# Altium PCB RodManipulator_PCB.PcbDoc (part 1 of 2)
Units mm, origin at the board's own origin, x right, y up, seen from the top; angles counter-clockwise.
Board outline 49.23 x 28.82 mm, 2 copper layers (Top Layer, Bottom Layer); 74 components, 46 nets, 222 pads, 100 vias.
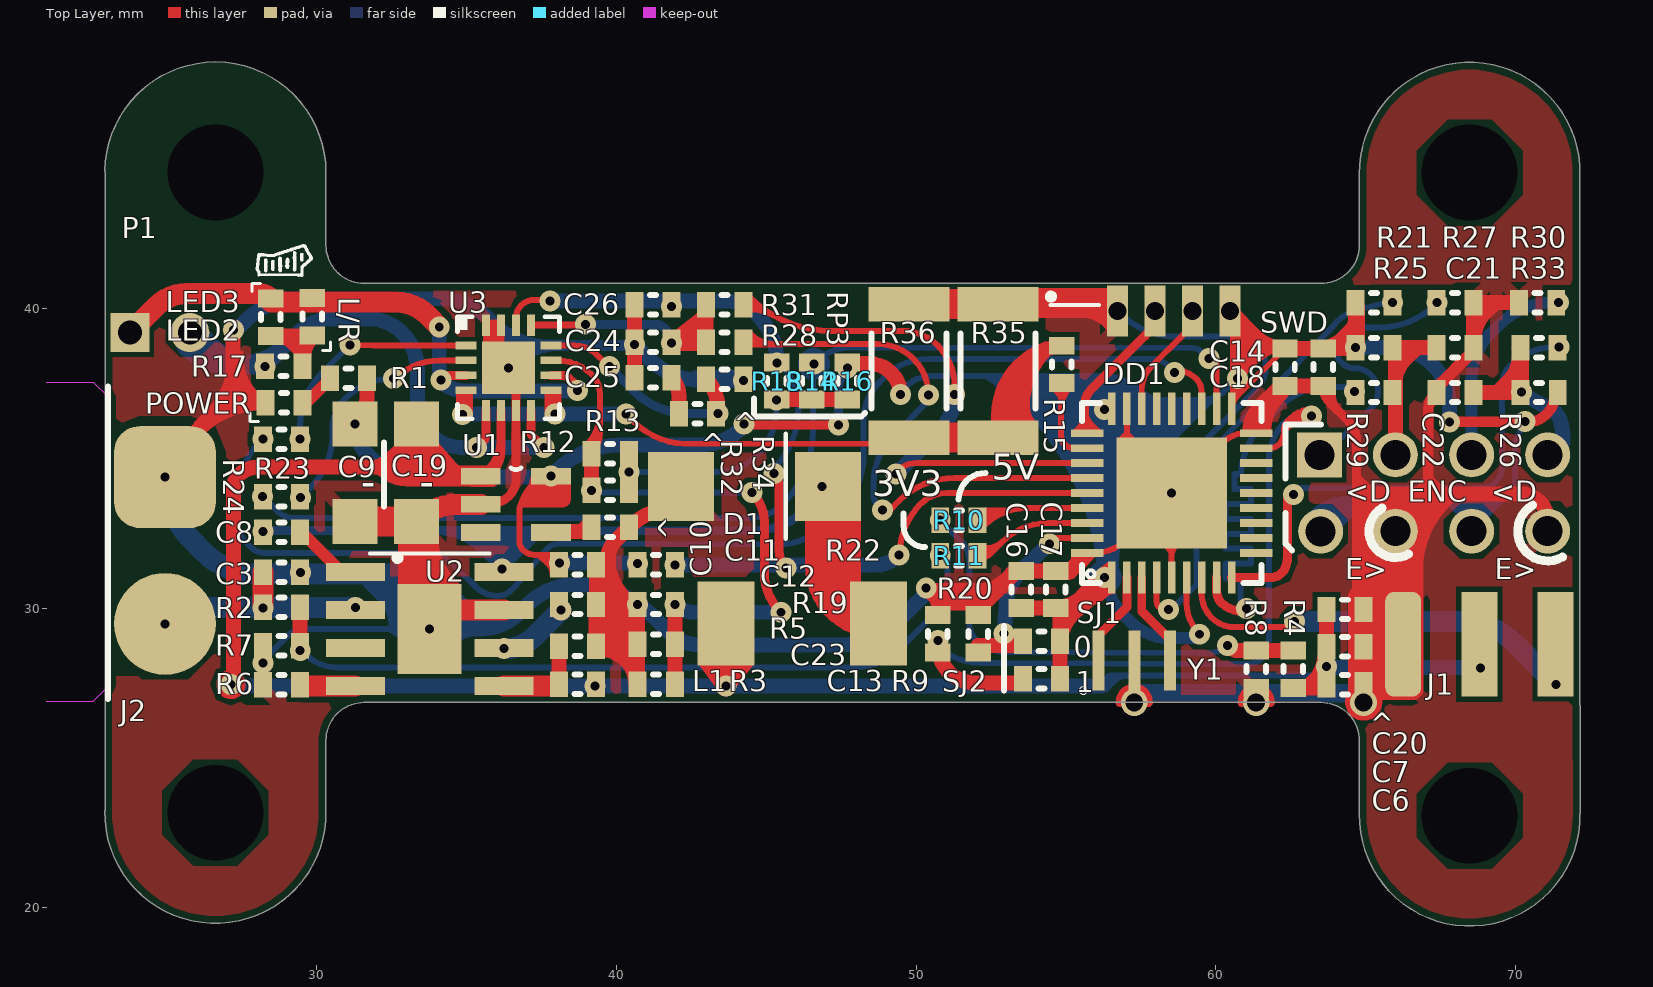
[diagram p0: Top Layer view]
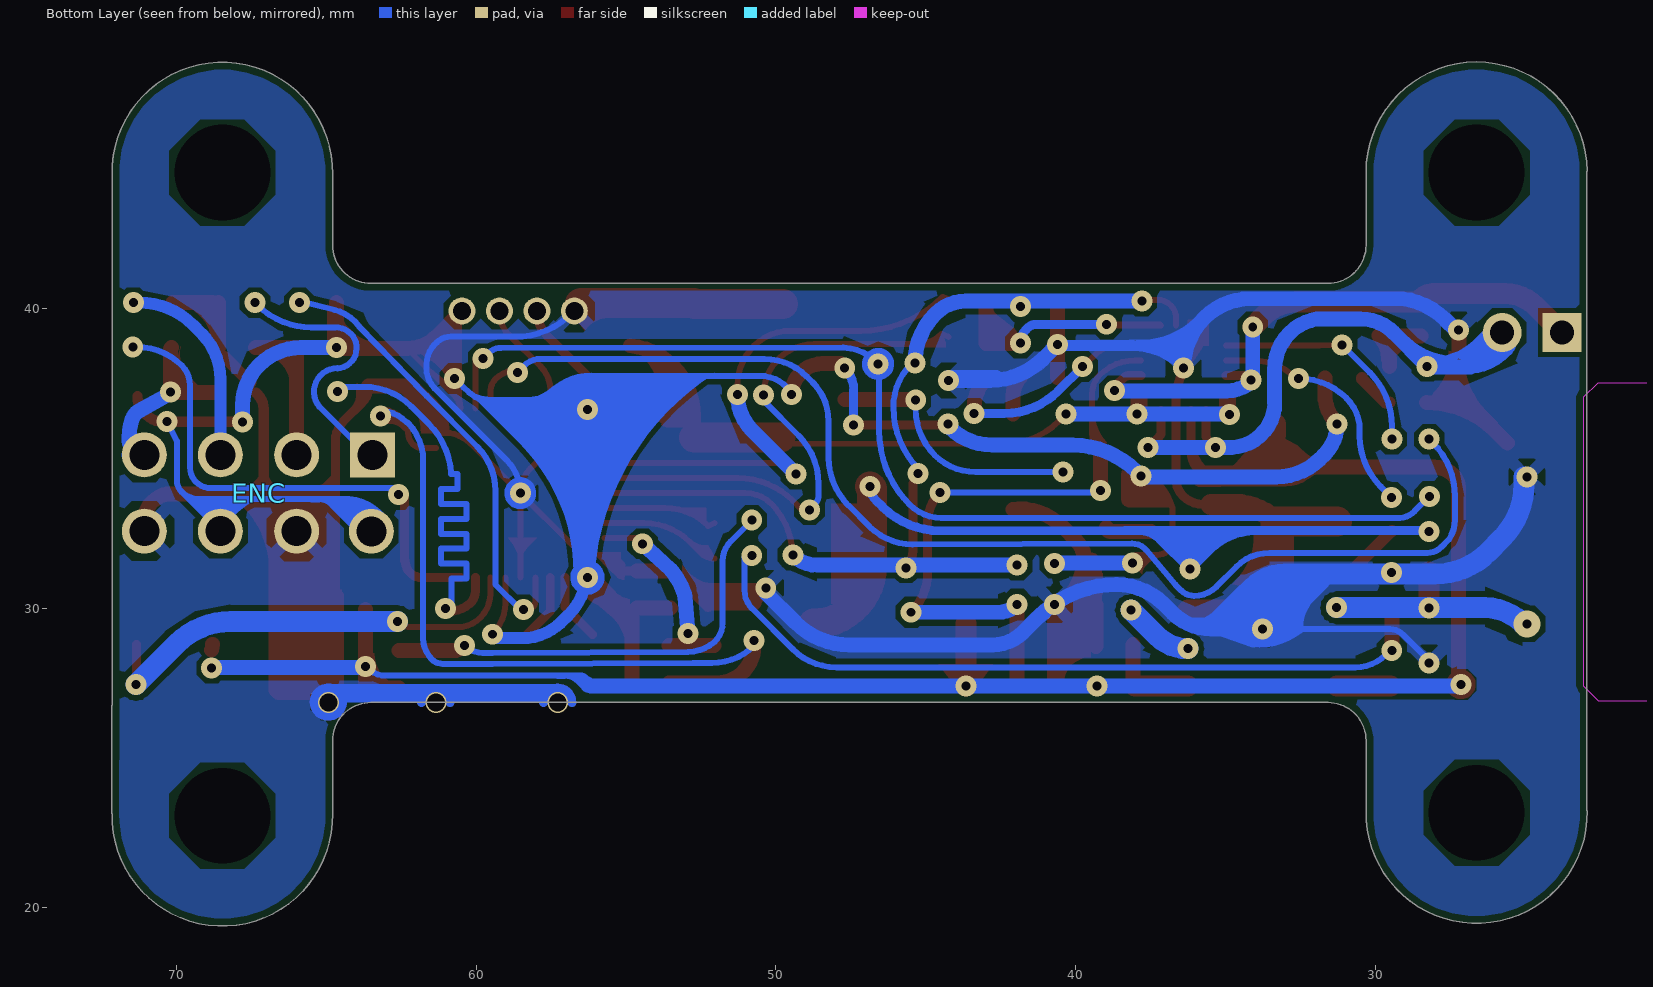
[diagram p1: Bottom Layer view, seen from below]
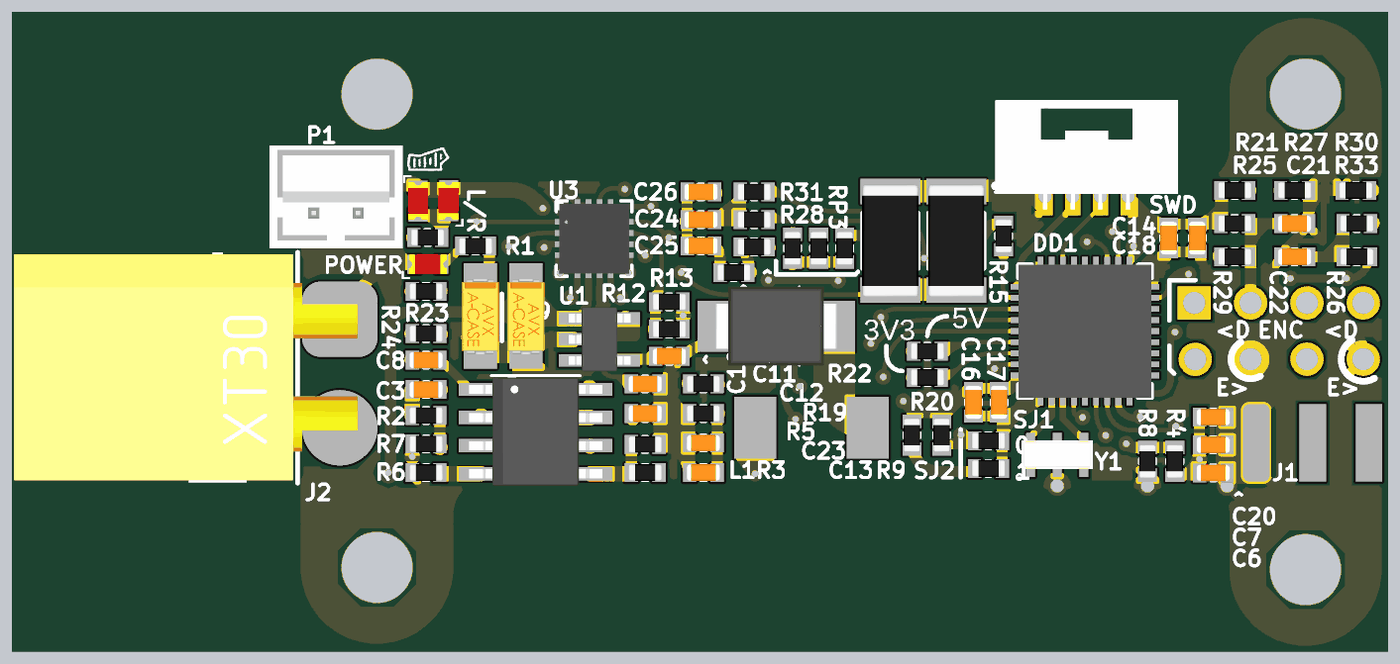
[diagram p3: 3D render of the assembled board from above, using the file's embedded part models]

## Layer stack, top to bottom
Top Solder: solder mask 0.0102, Solder Resist, Dk 3.5
Top Layer: signal copper 0.0356
Dielectric 1: dielectric 0.32, FR-4, Dk 4.8
Bottom Layer: signal copper 0.0356
Bottom Solder: solder mask 0.0102, Solder Resist, Dk 3.5

## Board outline
30.31,23.23 30.31,25.58 cw(c31.58,25.58) 31.58,26.85 63.52,26.85 cw(c63.52,25.58) 64.79,25.58 64.79,23.13 ccw(c68.47,23.07) 72.15,23.13 72.16,23.13 72.16,26.75 72.152,26.75 72.152,40.665 72.15,40.75 72.15,44.47 ccw(c68.47,44.53) 64.79,44.47 64.79,42.108 cw(c63.52,42.108) 63.52,40.838 61.148,40.838 31.58,40.838 cw(c31.58,42.108) 30.31,42.108 30.31,44.53 ccw(c26.62,44.53) 22.93,44.57 22.94,44.57 22.94,23.23 22.93,23.23 ccw(c26.62,23.17)

## Design rules (kind name [scope] priority, off if disabled: settings)
BoardOutlineClearance [All] p1: gap=0.25 ignorepadtopadclearanceinfootprint=FALSE
Clearance [All] p1: gap=0.17 ignorepadtopadclearanceinfootprint=FALSE
ComponentClearance [All] p1: gap=0.254 collisioncheckmode=3 verticalgap=2540 showdistances=FALSE
FanoutControl Fanout_SOIC [IsSOIC] p3: bgadir=Out bgaviamode=Closest fanoutstyle=Auto fanoutdirection=Alternating viagrid=0.025 // Fanout_SOIC (Default Rule)
FanoutControl Fanout_Small [(CompPinCount < 5)] p4: bgadir=Out bgaviamode=Closest fanoutstyle=Auto fanoutdirection=OutThenIn viagrid=0.025 // Fanout_Small (Default Rule)
FanoutControl Fanout_Default [All] p5: bgadir=In bgaviamode=Closest fanoutstyle=Auto fanoutdirection=Alternating viagrid=0.025 // Fanout_Default (Default Rule)
HoleSize [All] p1: absolutevalues=TRUE maxlimit=4.5 minlimit=0.3 maxpercent=80.000 minpercent=20.000
HoleToHoleClearance [All] p1: gap=0.4 allowstackedmicrovias=TRUE
MatchedLengths xtal [InNetClass('XTAL')] p1: tolerance=0.1 checknetsindiffpair=FALSE checkdiffpairvsdiffpair=TRUE checkxsignals=TRUE checkothers=TRUE
MatchedLengths EncoderSignal [InNetClass('ENC')] p2: tolerance=0.1 checknetsindiffpair=FALSE checkdiffpairvsdiffpair=TRUE checkxsignals=TRUE checkothers=TRUE
MinimumSolderMaskSliver [All] p1: minsoldermaskwidth=0.15
PlaneClearance [All] p1: clearance=0.2
PlaneConnect [All] p1: planeconnectstyle=Relief reliefexpansion=0.5 reliefentries=4 reliefconductorwidth=0.2 reliefairgap=0.25
PolygonConnect PolygonConnect_1 [InNet('GND')] p1: connectstyle=Relief reliefconductorwidth=0.4 reliefentries=4 polygonreliefangle="45 Angle" airgapwidth=0.254
PolygonConnect [All] p2: connectstyle=Relief reliefconductorwidth=0.3 reliefentries=4 polygonreliefangle="90 Angle" airgapwidth=0.16
RoutingCorners [All] p1: cornerstyle=45-Degree minsetback=2.5 maxsetback=2.5
RoutingPriority [All] p1 off: routingpriority=0
RoutingVias [All] p1: holewidth=0.3 width=0.7 viastyle="Through Hole" minholewidth=0.3 minwidth=0.7 maxholewidth=0.8 maxwidth=1.2
SilkToSilkClearance [All] p1: silktosilkclearance=0
SilkToSolderMaskClearance [IsPad] p1: minsilkscreentomaskgap=0 clearancetoexposedcopper=TRUE
SolderMaskExpansion [All] p1: expansion=0.1 istentingtop=FALSE
Width [All] p1: maxlimit=5 minlimit=0.17 preferedwidth=0.3
17 further rules are at their usual default settings.

## Classes and differential pairs
net class ENC: ENC1 ENC2
net class XTAL: NetDD1_2 NetDD1_3

## Components (designator, comment, footprint, x,y, rotation, side; value= is the part's Value field where it differs from the comment)
C3 "10uF" SMD_CAP_0603 28.83,31.197 r0 top
C6 "10uF" SMD_CAP_0603 64.314,27.44 r180 top
C7 "100nF" SMD_CAP_0603 64.314,28.705 r0 top
C8 "100nF" SMD_CAP_0603 28.83,32.525 r0 top
C9 "470uf" "Tantalum Cap Size A - 1206" 31.273,34.443 r90 top
C10 "10nF" SMD_CAP_0603 39.794,32.693 r180 top
C11 "10nF" SMD_CAP_0603 38.704,31.453 r180 top
C12 "330nF" SMD_CAP_0603 38.704,30.12 r0 top
C13 "10nF" SMD_CAP_0603 41.33,27.453 r0 top
C14 "100nF" SMD_CAP_0603 63.59,38.038 r270 top
C16 "100nF" SMD_CAP_0603 53.51,30.623 r90 top
C17 "10uF" SMD_CAP_0603 54.655,30.623 r90 top
C18 "10uF" SMD_CAP_0603 62.31,38.038 r270 top
C19 "22uF" "Tantalum Cap Size A - 1206" 33.332,34.443 r90 top
C20 "2.2uF" SMD_CAP_0603 64.314,29.953 r0 top
C21 "10nF" SMD_CAP_0603 67.98,38.693 r180 top
C22 "10nF" SMD_CAP_0603 67.98,37.193 r0 top
C23 "10nF" SMD_CAP_0603 41.33,28.786 r180 top
C24 "10nF" SMD_CAP_0603 41.22,38.867 r0 top
C25 "22nF" SMD_CAP_0603 41.22,37.686 r180 top
C26 "1nF" SMD_CAP_0603 41.22,40.118 r0 top
D1 "SK56" *SMB_P6SMB62AT3G(Primary) 44.61,34.063 r0 top
DD1 "STM32F103T8" *QFN50P600X600X100-37N 58.53,33.836 r90 top
ENC "BoxHeader 2x4" "Box Header 2x4" 71.12,35.103 r270 bottom (schematic designator P2)
J1 "PLS-3" "HDR Side 3 pin" 68.794,28.793 r0 top
J2 "XT30-M" "XT30-M side" 24.94,29.473 r90 top
L1 "IHLP2020BZER100M01" IHLP 46.2,29.483 r0 top value=10uH
LED2 "LED" LED0603 29.869,39.745 r270 top
LED3 "LED" LED0603 28.449,39.685 r90 top
P1 "Connector" "PH Connector 2Pin" 24.818,39.143 r0 top
POWER "LED" LED0603 28.93,36.832 r180 top (schematic designator LED1)
R1 "220R" "RES 0603 (1608X06L)" 30.44,37.674 r0 top
R2 "180K" "RES 0603 (1608X06L)" 29.452,30.03 r180 top
R3 "56K" "RES 0603 (1608X06L)" 38.082,27.453 r0 top
R4 "10K" "RES 0603 (1608X06L)" 62.58,28.584 r270 top
R5 "10K" "RES 0603 (1608X06L)" 39.325,28.722 r180 top
R6 "56K" "RES 0603 (1608X06L)" 28.208,27.445 r0 top
R7 "10K" "RES 0603 (1608X06L)" 28.208,28.742 r0 top
R8 "10K" "RES 0603 (1608X06L)" 61.35,27.34 r90 top
R9 "10K" "RES 0603 (1608X06L)" 50.73,28.518 r90 top
R10 "0R" "RES 0603 (1608X06L)" 50.807,32.931 r0 top
R11 "0R" "RES 0603 (1608X06L)" 50.807,31.749 r0 top
R12 "47K" "RES 0603 (1608X06L)" 40.416,33.924 r180 top
R13 "47K" "RES 0603 (1608X06L)" 40.416,35.156 r180 top
R14 "0R" "RES 0603 (1608X06L)" 46.525,36.953 r90 top
R15 "0R" "RES 0603 (1608X06L)" 54.86,38.753 r270 top
R16 "0R" "RES 0603 (1608X06L)" 47.7,36.953 r90 top
R17 "330R" "RES 0603 (1608X06L)" 28.278,38.064 r0 top
R18 "0R" "RES 0603 (1608X06L)" 45.35,36.953 r90 top
R19 "10K" "RES 0603 (1608X06L)" 41.952,30.12 r180 top
R20 "10K" "RES 0603 (1608X06L)" 52.07,29.762 r270 top
R21 "10K" "RES 0603 (1608X06L)" 64.66,40.193 r0 top
R22 "18K" "RES 0603 (1608X06L)" 41.952,31.453 r180 top
R23 "330R" "RES 0603 (1608X06L)" 29.452,35.63 r180 top
R24 "330R" "RES 0603 (1608X06L)" 29.452,33.722 r180 top
R25 "10K" "RES 0603 (1608X06L)" 64.66,38.693 r0 top
R26 "10K" "RES 0603 (1608X06L)" 71.41,37.193 r180 top
R27 "330R" "RES 0603 (1608X06L)" 67.358,40.193 r0 top
R28 "10K" "RES 0603 (1608X06L)" 42.994,38.867 r0 top
R29 "10K" "RES 0603 (1608X06L)" 64.66,37.193 r0 top
R30 "10K" "RES 0603 (1608X06L)" 70.16,38.693 r0 top
R31 "330R" "RES 0603 (1608X06L)" 42.994,40.118 r0 top
R32 "1K" "RES 0603 (1608X06L)" 43.328,36.48 r180 top
R33 "330R" "RES 0603 (1608X06L)" 71.36,40.193 r180 top
R34 "47K" "RES 0603 (1608X06L)" 42.994,37.638 r0 top
R35 "3.3R" "RES 2010 (5026X08L)" 52.729,37.914 r270 top
R36 "3.3R" "RES 2010 (5026X08L)" 49.759,37.914 r270 top
SJ1 "SmdJumper" "RES 0603 (1608X06L)" 53.56,28.888 r0 top
SJ2 "SmdJumper" "RES 0603 (1608X06L)" 53.56,27.643 r0 top
SWD "SM04B-GHS-TB(LF)(SN)-" JST_BM04B-GHS-holes 58.6,43.263 r180 top (schematic designator SWD1)
U1 "SPX3819M5-L-3-3/TR" *SOT95P280X145-5N 36.65,33.463 r0 top value=3V3
U2 "LMR16030SDDAR" "*SOIC127P600X170-9N - duplicate" 33.77,29.3 r0 top
U3 "STSPIN250" VFQFPN-16 36.401,38.013 r0 top
Y1 "CSTCE8M00G55-R0" *OSC_CSTCE8M00G55-R0 57.28,28.25 r0 top

## Footprints (in the part's own frame and the unit in brackets; to place one, negate y for a bottom-side part, rotate by r counter-clockwise, add the part's x,y. Pads: shape width x height; smd on the part's side, far side on the other; paste and mask are expansions set on the pad)
*OSC_CSTCE8M00G55-R0 [mm]
  rect 0.4x2 smd: 1(-1.2,0) 2(0,0) 3(1.2,0)
  silkscreen extent -1.83,-1.13 -1.57,-0.87, body extent -1.6,-0.65 1.6,0.65, height 1
*QFN50P600X600X100-37N [mm]
  rect 1.08x0.26 smd: 1(-2.815,2) 2(-2.815,1.5) 3(-2.815,1) 4(-2.815,0.5) 5(-2.815,0) 6(-2.815,-0.5) 7(-2.815,-1) 8(-2.815,-1.5) 9(-2.815,-2) 19(2.815,-2) 20(2.815,-1.5) 21(2.815,-1) 22(2.815,-0.5) 23(2.815,0) 24(2.815,0.5) 25(2.815,1) 26(2.815,1.5) 27(2.815,2)
  rect 0.26x1.08 smd: 10(-2,-2.815) 11(-1.5,-2.815) 12(-1,-2.815) 13(-0.5,-2.815) 14(0,-2.815) 15(0.5,-2.815) 16(1,-2.815) 17(1.5,-2.815) 18(2,-2.815) 28(2,2.815) 29(1.5,2.815) 30(1,2.815) 31(0.5,2.815) 32(0,2.815) 33(-0.5,2.815) 34(-1,2.815) 35(-1.5,2.815) 36(-2,2.815)
  rect 3.7x3.7 smd: 37(0,0)
  silkscreen extent -3,-3 3,3, body extent -3,-3 3,3, height 1
*SMB_P6SMB62AT3G(Primary) [mm]
  rect 2.2x2.3 smd: A(-2.45,0) C(2.45,0)
  silkscreen extent 1.05,-1.75 1.05,1.75, body extent -2.72,-1.78 2.72,1.78, height 2.49
"*SOIC127P600X170-9N - duplicate" [mm]
  rect 1.97x0.6 smd: 1(-2.475,1.905) 2(-2.475,0.635) 3(-2.475,-0.635) 4(-2.475,-1.905) 5(2.475,-1.905) 6(2.475,-0.635) 7(2.475,0.635) 8(2.475,1.905)
  rect 2.13x3 smd: 9(0,0)
  silkscreen extent -2,2.27 2,2.52, body extent -3,-2.45 3,2.45, height 1.69
*SOT95P280X145-5N [mil]
  rect 52x22 smd: 1(-46,37) 2(-46,0) 3(-46,-37) 4(46,-37) 5(46,37)
  silkscreen extent -7,46 7,48, body extent -55,-57 55,57, height 57
"Box Header 2x4" [mm]
  rect 1.5x1.5 hole 1: 1(-0.006,7.666)
  round 1.5 hole 1: 2(2.54,7.62) 3(-0.006,5.126) 4(2.534,5.126) 5(-0.006,2.586) 6(2.534,2.586) 7(-0.006,0.046) 8(2.534,0.046)
"HDR Side 3 pin" [mm]
  rrect50% 1.2x3.5 smd: 1(-2.54,0)
  rect 1.2x3.5 smd: 2(0,0) 3(2.54,0)
IHLP [mil]
  rect 75x110 smd: 1(-100,0) 2(100,0)
  body extent -100,-100 100,100, height 79
JST_BM04B-GHS-holes [mm]
  rect 0.7x1.7 / inner rect 0.6x1.7 / far side round 0.9 hole 0.6: 1(1.875,3.35) 2(0.625,3.35) 3(-0.625,3.35) 4(-1.875,3.35)
  silkscreen extent 2.5,2.77 4.2,3.15, body extent -4.12,-1.02 4.12,3.93, height 4.15
LED0603 [mm]
  rect 0.6x0.85 smd: 1(-0.6,-0.021) 2(0.644,-0.021)
  silkscreen extent -0.08,-0.35 1.15,0.6, body extent -0.82,-0.48 0.88,0.42, height 0.9
"PH Connector 2Pin" [mm] "Connector; D Subminiature; 15 Position; Right Angle; Pitch 0.762 mm"
  rect 1.3x1.3 hole 0.8: 1(-1.05,0.05)
  round 1.3 hole 0.8: 2(0.95,0.05)
  body extent -3.05,-1.57 2.95,3.08, height 6.07
"RES 0603 (1608X06L)" [mm] "Chip Resistor, 2-Leads, Body 1.6x0.8mm, IPC High Density _ (0.063W)"
  rect 0.6x0.85 smd: 1(0,0) 2(1.244,0)
  silkscreen extent 0.52,-0.33 0.72,0.33, body extent -0.14,-0.38 1.38,0.38, height 0.45
"RES 2010 (5026X08L)" [mm] "Chip Resistor, 2-Leads, Body 5.0x2.6mm, IPC High Density _ (0.250 W)"
  rect 1.15x2.7 smd: 1(-2.225,0) 2(2.225,0)
  silkscreen extent -1.25,-1.25 1.25,1.25, body extent -2.54,-1.27 2.54,1.27, height 0.6
SMD_CAP_0603 [mm]
  rect 0.6x0.85 smd: 1(-0.622,0) 2(0.622,0)
  silkscreen extent -0.1,-0.33 0.1,0.33, body extent -0.76,-0.38 0.76,0.38, height 0.6
"Tantalum Cap Size A - 1206" [mm] "Tantalum Cap Size A - 1206"
  rect 1.5x1.5 smd: 1(1.7,0) 2(-1.55,0)
  silkscreen extent -1.05,-0.97 1.07,-0.97, body extent -1.65,-0.84 1.75,0.84, height 1.71
VFQFPN-16 [mm]
  rect 0.708x0.255 smd paste+0 mask+0: 1(-1.421,0.75) 2(-1.421,0.25) 3(-1.421,-0.25) 4(-1.421,-0.75) 9(1.421,-0.75) 10(1.421,-0.25) 11(1.421,0.25) 12(1.421,0.75)
  rect 0.255x0.708 smd paste+0 mask+0: 5(-0.75,-1.421) 6(-0.25,-1.421) 7(0.25,-1.421) 8(0.75,-1.421) 13(0.75,1.421) 14(0.25,1.421) 15(-0.25,1.421) 16(-0.75,1.421)
  rect 1.753x1.753 smd paste+0 mask+0: 17(0,0)
  silkscreen extent -1.7,-1.7 1.7,1.7, body extent -1.57,-1.57 1.58,1.58, height 0.94
"XT30-M side" [mm]
  rrect50% 3.4x3.4 smd: MINUS(4.9,0)
  round 3.4 smd: PLUS(0,0)
  Top Layer pour cut-out: -1.75,1.9 -1.75,0 0,-1.75 4.775,-1.75 6.65,0.125 6.65,2.7 -1.625,2.7 -1.775,2.55
  Keep-Out Layer board cut-out: -2.575,14.775 -2.575,2.4 -2.075,1.9 7.575,1.9 8.05,2.375 8.05,14.775
  silkscreen extent -2.5,1.9 7.93,1.9, body extent -2.47,-0.8 7.93,14.7, height 4

## Part data
C3 C6 C7 C8 C10 C11 C12 C13 C14 C16 C17 C18 C20 C21 C22 C23 C24 C25 C26: library part Cap-Bipolar, "Bipolar Capacitor", Voltage=100V, Adding Date=1387/12/20, Designer="Saeid Jorablo", Organazation=ControTec
C9: library part "Capacitor Polarized", "470uf,16v", Designer="Hamed Jafarzadeh ( R2T )"
C19: library part "Capacitor Polarized", Designer="Hamed Jafarzadeh ( R2T )"
D1: "Диод Шоттки 5А 60В [SMB / DO-214AA]", Package="DO-214 Littelfuse", ChipDip_Link=https://www.chipdip.ru/product/sk56, MF="Littelfuse Inc.", MP=SK56, SnapEDA_Link=https://www.snapeda.com/parts/P6SMB62AT3G/Littelfuse%20Inc./view-part/?ref=snap, Type=SMD
DD1: "STM32F103T8U6, Микроконтроллер 32BIT ARM 64K FLASH [VFQFPN-36]", Package=VFQFPN-36, ChipDip_Link=https://www.chipdip.ru/product/stm32f103t8u6-2, HelpURL=http://www.st.com/stonline/products/literature/ds/13587.pdf, MF=STM, MP=STM32F103T8U6, SnapEDA_Link=https://www.snapeda.com/parts/STM32F103T8U6TR/STMicroelectronics/view-part/?ref=search&t=STM32F103T8U6, Type=SMD
J1: "Header, 3-Pin", ChipDip_Link=https://www.chipdip.ru/product/pls-3, HelpURL=https://static.chipdip.ru/lib/227/DOC000227157.pdf, MF="Connfly electronic (Zhenqin)", MP="PLS-3 (DS1021-1x3)", System=Connector, Type=SMD
J2: Package="Package Analog Devices", Availability=Unavailable, MF=AMASS, MP=XT60-M, Price=None, SnapEDA_Link=https://www.snapeda.com/parts/XT60-M/AMASS/view-part/?ref=snap
L1: "10µH Shielded Molded Inductor 2.3A 199mOhm Max Nonstandard", Package="Nonstandard Vishay", ChipDip_Link=https://www.chipdip.ru/product/ihlp2020bzer100m11-inductor-ihlp-smd-2020-10, HelpURL=http://www.vishay.com/docs/34253/ihlp-2020bz-01.pdf, MF="Vishay Dale", MP=IHLP2020BZER100M01, SnapEDA_Link=https://www.snapeda.com/parts/IHLP2020BZER100M01/Vishay%20Dale/view-part/44808/?ref=snap, Type=SMD
P1: library part "Connector 2Pin", Designer="Hamed Jafarzadeh - www.R2T.ir"
R1 R2 R3 R4 R5 R6 R7 R8 R9 R10 R11 R12 R13 R14 R15 R16 R17 R18 R19 R20 R21 R22 R23 R24 R25 R26 R27 R28 R29 R30 R31 R32 R33 R34 R35 R36: library part Resistor, "Resistor", Power="1/8 W", Tolerance=5%
SWD: library part "SWD SM04B-GHS-TB(LF)(SN)-", "Conn Shrouded Header HDR 4 POS 1.25mm Solder ST SMD Reel", Package=None, Instructions="Do not install", MF="JST Sales", MP=SM04B-GHS-TB(LF)(SN), SnapEDA_Link=https://www.snapeda.com/parts/BM04B-GHS-TBT%28LF%29%28SN%29%28N%29/JST%20Sales%20America%20Inc./view-part/?ref=snap, System=Connector, Type=SMD
U1: "Low Dropout Voltage Regulator, Adjustable 0.5A, В±1%, 2.5 to 16 Vin, 5-Pin SOT-23", Package="SOT-23-5 Exar", ChipDip_Link=https://www.chipdip.ru/product1/8003455237, HelpURL=http://www.farnell.com/datasheets/2614478.pdf, MF="MaxLinear, Inc.", MP=SPX3819M5-L-3-3/TR, SnapEDA_Link=https://www.snapeda.com/parts/SPX3819M5-L/MaxLinear%2C%20Inc./view-part/?ref=snap, Type=SMD
U2: "LMR16030SDDAR, Conv DC-DC 4.3V to 60V Step Down Single-Out 1V to 50V 3A Automotive 8-Pin HSOP EP T/R", Package="PowerSOIC-8 Texas Instruments", ChipDip_Link=https://www.chipdip.ru/product1/8003448566, HelpURL=https://www.ti.com/lit/ds/symlink/lmr16030.pdf, MF="Texas Instruments", MP=LMR16030SDDAR, SnapEDA_Link=https://www.snapeda.com/parts/TPS54560DDA/Texas%20Instruments/view-part/?ref=snap, Type=SMD
U3: "No Description Available", Manufacturer_Part_Number=STSPIN220, Built_By="Ehsan Shaghaei", Copyright="Copyright (C) 2018 Accelerated Designs. All rights reserved", RefDes=RefDes, SourceLibrary=Update_to_database_2020-12-04, Type=DEV, Vendor=STMicroelectronics
Y1: "Ceramic Resonator 8MHz ??0.5% _Tol_ ??0.2% _Stability_ 33pF 40Ohm 3-Pin CSMD T/R", Package="SMD-3 Murata", ChipDip_Link=https://www.chipdip.ru/product1/8001783721, HelpURL=https://www.murata.com/en-eu/api/pdfdownloadapi?cate=&partno=CSTCE8M00G55-R0, MF=Murata, MP=CSTCE8M00G55-R0, SnapEDA_Link=https://www.snapeda.com/parts/CSTCE8M00G55-R0/Murata%20Electronics%20North%20America/view-part/?ref=snap, Type=SMD
ENC: Designer="HamedJafarzadeh - ww.R2T.ir"
LED2 LED3 POWER: Designer="Razi Research Team Of Mashhad - Hamed Jafarzadeh"

## Free pads (board coordinates)
  round 1.5 hole 3.2: 1(68.47,44.53) 2(26.62,44.53) 3(26.62,23.17) 4(68.47,23.07)

## Via types
v1: diameter 0.7, hole 0.3, Top Layer to Bottom Layer, tented both sides, 91 vias
v2: diameter 0.7/0.7 (per signal layer), hole 0.3, Top Layer to Bottom Layer, tented both sides, 4 vias
v3: diameter 0.9/0.7 (per signal layer), hole 0.6, Top Layer to Bottom Layer, tented both sides, 3 vias
v4: diameter 0.9, hole 0.3, Top Layer to Bottom Layer, tented both sides, 1 vias
v5: diameter 0.9/0.7 (per signal layer), hole 0.3, Top Layer to Bottom Layer, tented both sides, 1 vias

## Nets (pads, with @x,y where several pads share a name; then routed paths per layer and width w, separated by ;. In a path a pad name is that pad's centre, name@x,y a point inside that pad or via, vN(x,y) a via of type N, cw(c..) or ccw(c..) an arc to the next point about the centre after c; other vN are vias at no path point)
+3v3: C9.1 C11.2 C14.1 C16.1 C17.1 C18.1 DD1.1 DD1.6 DD1.19 DD1.27 ENC.2 ENC.6 R1.2 R16.2 R21.1 R22.2 R25.1 R26.1 SJ1.2 SJ2.2 SWD.4 U1.5 | length 96.3
  Top Layer w0.2: 36.769,32.42 cw(c37.413,32.428) 36.769,32.428 36.769,32.593 ; 37.534,31.68 C11.2@37.854,31.36 ; v1(37.818,34.403) 37.575,34.403 ccw(c37.575,33.986) 37.158,33.986 36.769,33.338 36.769,32.209 ccw(c37.149,32.209) 36.88,31.94 ccw(c37.271,32.331) 37.271,31.778 C11.2@38.01,31.778 ; DD1.6@59.03,31.021 59.03,30.169 ccw(c60.504,30.169) v1(59.462,29.127) ; v1@60.885,37.507 ccw(c61.741,36.651) DD1.19@60.53,36.651 cw(c61.083,36.651) 60.692,37.042 C18.1@62.31,38.66
  Top Layer w0.3: v1(40.702,31.491) R22.2@40.708,31.453 ; v1@44.158,36.141 ccw(c44.232,36.215) 44.232,36.11 v1(47.404,36.11) ; v2(47.704,38.008) R16.2@47.849,38.153 ; C17.1@54.655,30.001 54.669,29.986 54.95,29.986 ccw(c54.95,31.986) 56.313,30.523 56.452,30.662 ccw(c56.389,30.726) DD1.1@56.479,30.726
  Top Layer w0.35: v1(67.791,36.212) 70.307,36.212 v1(70.312,36.217) 70.449,36.217 ccw(c70.449,37.011) 71.01,36.45 71.07,36.51 ccw(c70.512,37.069) R26.1@71.302,37.069
  Top Layer w0.5: v1(31.273,36.143) ccw(c30.28,37.136) 31.684,37.136 R1.2@31.684,37.674 ; R16.2@47.849,38.153 48.44,38.153 cw(c48.44,37.12) v1(49.474,37.12) ; C16.1@53.51,30.001 C17.1@54.655,30.001 ; SJ2.2@54.804,27.503 C17.1@54.804,29.811 ; SWD.4@60.475,39.913 61.316,39.072 ccw(c62.31,40.066) 62.298,38.66 ccw(c62.31,40.066) C18.1@62.31,38.66 C14.1@63.59,38.66 ; C14.1@63.591,38.661 64.628,38.661 v1(64.66,38.693) R21.1@64.66,40.193
  Bottom Layer w0.2: v1(49.474,37.12) 49.639,37.374 cw(c50.547,36.466) 50.018,37.636 cw(c50.547,36.466) 50.547,37.75 54.111,37.75 cw(c54.111,35.21) 55.907,37.006 55.942,36.971 v1@56.29,36.623 ; v1@56.29,31.298 56.29,31.443 56.29,36.13 v1@56.29,36.623 ; v1@59.346,29.006 ccw(c59.346,29.233) v1@59.507,29.073 ; v1(60.718,37.66) 60.424,37.367 cw(c58.628,39.163) 58.628,36.623 56.783,36.623 v1(56.294,36.623) v1@56.29,36.623 ; ENC.2@63.5,32.563 63.664,32.727 ccw(c63.144,33.247) 63.88,33.247 cw(c64.874,32.253) 64.604,33.633 69.23,33.633 ccw(c69.23,34.478) 69.827,33.88 68.547,32.6 ccw(c68.578,32.569) ENC.6@68.534,32.569 ; 69.828,33.881 ccw(c69.435,34.273) 69.99,34.273 69.99,35.573 v1(70.312,36.217)
  Bottom Layer w0.3: v1(37.818,34.403) v1@37.97,34.554 ; v1(47.404,36.11) 47.404,37.284 cw(c48.428,37.284) v2(47.704,38.008) ; 56.71,31.069 ccw(c56.29,31.021) 56.29,31.443 ccw(c56.29,31.021) 56.401,30.613 ccw(c56.29,31.021) 56.712,31.029 ; 55.942,36.971 cw(c56.29,36.623) 56.783,36.623 cw(c56.29,36.623) 56.29,36.13 cw(c56.29,36.623) 55.942,36.971
  Bottom Layer w0.4: v1@56.29,31.298 ccw(c58.451,31.298) 56.401,30.613 ccw(c58.451,31.298) 56.923,29.77 57.141,29.552 ; 57.206,29.487 57.141,29.552 ; v1@59.346,29.006 58.268,29.006 cw(c58.49,30.901) 57.141,29.552
  Bottom Layer w0.5: v1(31.273,36.143) ccw(c32.708,36.143) 31.693,35.128 31.836,34.986 ccw(c33.315,36.464) 33.315,34.373 37.818,34.373 v1(37.818,34.403) ; v1@37.97,34.554 cw(c40.105,32.419) 40.105,35.439 42.782,35.439 ccw(c42.782,37.462) 44.212,36.031 v1(44.258,36.141) ; v1(38.095,31.506) 40.665,31.506 cw(c40.665,31.454) v1(40.702,31.491) ; v1@64.86,38.693 65.84,38.693 cw(c65.84,36.713) 67.24,38.113 cw(c65.909,36.782) 67.791,36.782 v1(67.791,36.212)
  other v1: 56.29,31.021
+12: C3.1 J2.PLUS R2.2 U2.2 | length 7.6
  Top Layer w0.7: R2.2@28.208,30.03 C3.1@28.208,31.197
  Bottom Layer w0.7: v4@25.04,29.473 cw(c25.088,29.425) 25.088,29.493 25.09,29.493 cw(c26.345,28.238) 26.345,30.013 v1(31.3,30.013)
  other v1: 28.208,30.01
  other v4: 24.94,29.473
ADC_5V: R4.1 R8.2 R10.1 | length 15.1
  Top Layer w0.5: v1(60.39,28.757) ccw(c60.768,29.084) 60.679,28.592 60.723,28.584 R8.2@61.35,28.584 R4.1@62.58,28.584
  Bottom Layer w0.2: v1@50.88,32.853 51.51,32.223 cw(c50.858,31.571) 51.78,31.571 51.78,29.502 ccw(c52.66,29.502) 52.038,28.88 ccw(c52.944,29.909) 52.934,28.538 59.46,28.507 59.786,28.507 ccw(c59.786,29.36) v1(60.39,28.757)
  other v1: 50.807,32.931
ADC_12V: R2.1 R7.2 R11.1 | length 25.3
  Top Layer w0.5: R7.2@29.452,28.742 R2.1@29.452,30.03 R2.1@29.452,30.04
  Bottom Layer w0.2: v1@29.452,28.642 29.647,28.448 ccw(c30.666,29.467) 30.666,28.026 47.984,28.026 ccw(c47.984,30.08) 49.437,28.627 50.798,29.988 ccw(c50.192,30.595) 51.049,30.595 v1@51.049,31.705
  other v1: 29.452,28.592 50.807,31.749
BOOT0: DD1.35 R20.2 SJ1.1 | length 6.4
  Top Layer w0.2: v1(54.452,32.146) cw(c54.65,32.12) 54.574,32.305 cw(c54.73,31.926) 54.73,32.336 DD1.35@55.715,32.336
  Top Layer w0.5: R20.2@52.07,28.748 SJ1.1@53.56,28.748
  Bottom Layer w0.5: v1(52.939,29.158) 53.038,30.381 cw(c53.536,30.34) 53.064,30.505 53.065,30.508 cw(c55.46,29.661) 53.461,31.228 cw(c53.855,30.921) 53.517,31.289 v1(54.452,32.146)
BOOT1: DD1.17 R9.1 SJ2.1 | length 26.3
  Top Layer w0.2: DD1.17@61.345,35.336 61.789,35.336 ccw(c61.789,35.804) 62.12,35.473 ccw(c61.757,35.835) 62.27,35.835 62.27,35.915 cw(c62.748,35.915) 62.41,36.253 cw(c63.158,35.505) 62.476,36.313 ; 62.49,36.333 cw(c63.226,35.597) 63.226,36.638 v1@63.239,36.638
  Top Layer w0.5: R9.1@50.73,28.748 ccw(c51.975,28.748) 51.975,27.503 SJ2.1@53.56,27.503
  Bottom Layer w0.2: v1@50.73,28.748 ccw(c52.134,30.152) 52.134,28.166 52.763,28.166 59.457,28.137 ccw(c59.462,29.127) 59.462,28.137 61.121,28.137 ccw(c61.121,28.639) 61.476,28.284 ccw(c60.768,28.992) 61.769,28.992 61.769,34.932 cw(c63.543,34.932) 62.262,36.158 cw(c62.406,36.02) 62.323,36.202 cw(c63.266,35.259) 63.266,36.592 v1@63.274,36.592
  other v1: 50.73,28.918 63.2,36.403
EN: DD1.31 R28.2 | length 18.7
  Top Layer w0.2: R28.2@44.238,39.047 44.473,39.144 ccw(c45.29,39.961) 45.29,38.806 48.733,38.806 cw(c48.733,37.135) 49.915,38.317 cw(c48.711,37.113) v1@50.413,37.113 ; v1@49.171,33.317 49.429,33.576 cw(c51.265,31.739) 51.265,34.336 DD1.31@55.715,34.336
  Bottom Layer w0.2: v1(48.879,33.276) 48.721,33.433 cw(c49.069,33.78) 48.578,33.78 48.578,34.14 cw(c50.867,34.14) 49.248,35.759 50.373,36.884 v1(50.413,37.113)
ENC1: DD1.8 R29.1 | length 17.4
  Top Layer w0.3: DD1.8@60.03,31.021 60.03,30.564 ccw(c60.58,30.564) 60.212,30.155 ccw(c60.92,30.941) 60.759,29.895 60.761,29.895 ccw(c60.805,30.192) 60.998,29.962 v1(61.02,29.981) ; v1(64.63,37.22) R29.1@64.66,37.193
  Bottom Layer w0.2: v1(61.02,29.981) 60.832,30.169 60.833,30.763 60.833,30.863 60.833,30.98 60.321,30.98 60.321,31.48 61.179,31.48 61.179,31.98 60.321,31.98 60.321,32.48 61.179,32.48 61.179,32.98 60.321,32.98 60.321,33.48 61.179,33.48 61.179,33.98 60.632,33.98 60.632,34.48 60.838,34.48 60.838,34.507 60.84,34.527 60.863,34.73 cw(c63.391,34.335) 60.881,34.83 cw(c63.391,34.335) 61.582,36.145 62.17,36.733 cw(c63.737,35.167) 63.762,37.382 64.145,37.381 64.24,37.381 cw(c64.24,36.829) 64.254,37.381 cw(c64.24,36.829) v1(64.63,37.22)
ENC2: DD1.9 R30.2 | length 17.1
  Top Layer w0.3: DD1.9@60.53,31.021 61.833,31.021 ccw(c61.833,31.54) 62.2,31.173 ccw(c61.79,31.583) 62.37,31.583 ; 62.386,31.583 v1@62.386,33.797 ; v1@62.516,33.637 cw(c62.974,33.243) 62.547,33.67 62.594,33.787 v1@62.601,33.804
  Bottom Layer w0.2: v1@62.713,34.003 68.85,34.003 ccw(c68.85,34.71) 69.35,34.21 ccw(c68.867,34.693) 69.55,34.693 69.55,35.019 ccw(c68.534,35.109) 69.55,35.199 69.55,37.438 cw(c70.472,37.438) 69.82,38.09 cw(c71.324,36.586) 71.324,38.713 v1(71.46,38.713)
  other v1: 62.59,33.788
FAULT: DD1.30 R31.2 | length 18.5
  Top Layer w0.2: R31.2@44.238,40.298 44.439,40.381 ccw(c47.163,43.105) 47.163,39.253 49.523,39.253 cw(c49.523,37.546) 50.73,38.753 cw(c49.388,37.411) 51.286,37.411 v1(51.286,37.13) ; v1@49.431,34.621 cw(c50.002,33.969) 50.002,34.836 DD1.30@55.715,34.836
  Bottom Layer w0.5: v1(49.328,34.468) 50.788,35.928 ccw(c49.587,37.13) v1(51.286,37.13)
FB: R3.1 R5.2 U2.5 | length 3.2
  Top Layer w0.5: R3.1@38.024,27.395 ccw(c38.024,27.453) R3.1@38.082,27.453 R5.2@38.082,28.786
  Top Layer w0.7: U2.5@36.245,27.395 R3.1@38.024,27.395
GND: C3.2 C6.1 C7.2 C9.2 C10.1 C11.1 C12.2 C13.1 C14.2 C16.2 C17.2 C18.2 C19.2 C20.2 C21.1 C22.1 C23.2 C24.1 C25.2 C26.1 D1.A DD1.5 DD1.18 DD1.26 DD1.36 DD1.37 ENC.4 ENC.8 J1.1 J2.MINUS POWER.2 R5.1 R6.1 R7.1 R8.1 R9.2 R19.2 R20.1 R27.2 R33.2 R34.2 R35.1 R36.1 SWD.1 U1.2 U2.7 U2.9 U3.7 U3.15 U3.16 U3.17 Y1.2 | length 184.2
  Top Layer w0.2: DD1.36@56.068,31.864 ccw(c56.068,33.046) 56.904,32.21 v5(58.53,33.836) ; DD1.26@57.03,36.651 57.03,35.823 58.186,34.667 cw(c57.354,33.836) v5(58.53,33.836) ; DD1.5@58.53,31.021 v5(58.53,33.836) ; C18.2@62.137,37.588 61.633,37.084 ccw(c62.329,36.388) 61.345,36.388 DD1.18@61.345,35.836 60.883,35.836 ccw(c61.08,34.56) 60.167,35.473 v5(58.53,33.836) ; C20.2@64.77,29.923 ccw(c64.426,30.267) C20.2@64.913,30.267 ; 65.297,33.266 65.32,33.243 ENC.4@65.994,32.569 ; 67.163,33.949 ccw(c67.358,33.949) 67.22,33.811
  Top Layer w0.3: J2.MINUS@24.77,34.413 v1(24.94,34.373) ; U1.2@35.482,33.463 35.753,33.463 ccw(c35.753,34.403) 36.418,33.738 ccw(c35.843,34.313) 36.651,34.223 ccw(c35.843,34.313) 36.656,34.313 36.656,35.167 ; U3.16@35.773,39.487 cw(c35.773,39.306) 35.901,39.434 ; 35.903,39.184 35.901,39.182 35.901,38.739 v1(36.401,38.013) 36.651,37.287 U3.7@36.651,36.592 36.651,35.167 ; 52.07,30.162 ccw(c52.07,30.451) 52.274,30.247 ; C17.2@54.755,31.245 55.082,31.245 ; 56.808,26.854 cw(c57.28,26.853) 57.752,26.853 ; 60.878,26.852 cw(c61.35,26.851) 61.822,26.851 ; C14.2@63.59,37.416 63.586,37.389 ccw(c64.34,37.389) 63.807,36.856 64.42,36.243 cw(c63.737,35.56) 64.703,35.56 C20.2@64.703,30.367 ; 65.408,26.863 ccw(c64.936,26.863) 65.408,26.863
  Top Layer w0.35: 67.093,33.949 67.093,36.645 cw(c67.778,36.645) 67.294,37.129 C22.1@67.358,37.193
  Top Layer w0.4: C12.2@39.326,30.12 C11.1@39.326,31.453 39.426,31.641 39.459,31.641 C11.1@39.467,31.649 ; 52.274,30.077 C16.2@53.52,31.323 ; C22.1@67.538,37.524 C21.1@68.392,38.378
  Top Layer w0.5: J2.MINUS@25.59,35.503 25.987,35.901 cw(c28.286,33.602) POWER.2@28.286,36.853 ; 27.211,36.796 27.211,39.267 v1(27.22,39.276) ; v1(33.77,29.3) cw(c34.405,29.3) U2.9@34.405,29.935 ; R5.1@39.325,28.722 39.326,28.723 R5.1@39.326,28.786 ; C12.2@39.326,30.12 R5.1@39.326,28.786 ; 39.447,30.955 C11.1@39.602,31.342 ; 39.689,31.531 cw(c40.739,31.531) 39.807,32.016 ccw(c39.472,32.268) 39.857,32.101 cw(c40.739,31.531) 39.996,32.273 C10.1@40.416,32.693 cw(c41.909,31.2) D1.A@41.909,33.311 ; C23.2@40.508,28.786 R5.1@39.326,28.786 ; C25.2@40.598,37.686 40.6,38.442 ; C26.1@40.598,40.118 40.602,39.292 40.598,39.288 C24.1@40.598,38.867 40.598,38.8 v1(40.602,38.8) ; C13.1@40.708,27.453 C23.2@40.708,28.786 v1(40.708,30.12) ; D1.A@41.838,33.282 D1.A@42.09,33.282 ; v1(50.339,30.676) 50.643,30.373 cw(c50.432,30.162) 50.73,30.162 52.07,30.162 ; C16.2@53.51,31.245 C17.2@54.655,31.245 ; C18.2@62.31,37.416 C14.2@63.59,37.416 ; C7.2@64.726,28.805 C7.2@64.936,28.805 ; C6.1@64.936,27.44 C7.2@64.936,28.705 C7.2@64.936,28.805 ; C20.2@64.936,29.953 C7.2@64.936,28.805 ; J1.1@66.254,28.793 66.242,28.805 65.276,28.805 ; C21.1@68.602,38.693 R27.2@68.602,40.193 ; R27.2@68.792,40.193 R33.2@70.116,40.193 ; ENC.8@71.074,32.569 71.074,32.909 ccw(c70.172,32.909) 70.172,33.811 67.22,33.811 66.131,33.811 ccw(c66.131,32.988) 65.549,33.57 ccw(c66.358,32.761) 65.32,33.243 ccw(c66.358,32.761) 65.214,32.761 65.214,30.478 ccw(c65.426,30.478) 65.276,30.328 65.276,28.805 ; C7.2@64.936,28.805 65.276,28.805
  Top Layer w0.7: C19.2@33.332,32.893 cw(c34.708,31.517) 34.708,33.463 U1.2@35.482,33.463 ; U2.9@34.405,29.935 U2.7@36.245,29.935
  Top Layer w1: C9.2@31.273,32.893 C19.2@33.332,32.893 33.332,30.357 ccw(c34.827,30.357) v1(33.77,29.3) ; R36.1@49.759,40.148 R35.1@52.729,40.148 ; R35.1@52.729,40.179 56.484,40.179 cw(c56.484,40.097) SWD.1@56.541,40.155
  Bottom Layer w0.2: v1(28.208,28.173) cw(c28.396,28.173) 28.263,28.306 29.07,29.113 cw(c29.507,28.676) 29.507,29.294 33.277,29.294 ; SWD.1@56.725,39.913 56.785,39.853 ccw(c58.735,41.803) 58.453,39.06 60.846,39.06 cw(c60.846,38.395) 61.316,38.865 61.376,38.805 cw(c60.686,38.114) 61.663,38.114 61.663,38.005 cw(c60.714,38.005) 61.385,37.335 58.985,34.935 ccw(c60.084,33.836) 58.602,34.304 ccw(c60.084,33.836) 58.577,34.215 ccw(c60.084,33.836) v5(58.53,33.836)
  Bottom Layer w0.3: 33.277,29.294 v1@33.764,29.294 ; 33.569,29.74 cw(c33.764,29.294) 34.251,29.3 ; 38.086,38.8 cw(c38.088,36.627) 38.088,38.8 ; v1@40.515,38.764 ccw(c40.515,38.887) v1(40.602,38.8) ; 56.808,26.854 cw(c57.28,26.853) 57.752,26.853 ; v5@58.912,33.847 cw(c58.53,33.836) 58.577,34.215 cw(c58.53,33.836) v5@58.911,33.861 ; 60.878,26.852 cw(c61.35,26.851) 61.822,26.851 ; 65.408,26.863 ccw(c64.936,26.863) 65.408,26.863
  Bottom Layer w0.372: v1@36.423,38.066 cw(c38.108,36.38) 38.106,38.764 v1@40.515,38.764
  Bottom Layer w0.375: v1(36.401,38.013) v1@36.423,38.066
  Bottom Layer w0.5: v1@27.32,39.276 27.66,39.616 cw(c29.409,37.867) 29.099,40.321 34.171,40.321 cw(c34.171,38.158) 35.699,39.688 cw(c34.003,37.993) v1@36.397,38.146 ; 32.035,31 cw(c31.064,28.653) 32.86,30.449 33.569,29.74 ; 32.035,31.133 32.09,31.133 ; v1@33.765,29.295 33.759,29.3 ccw(c33.77,29.558) v1(33.77,29.3) ; v1@33.808,29.3 34.251,29.3 35.469,29.3 ccw(c35.469,31.126) 36.76,29.835 37.054,30.128 cw(c38.642,28.54) 38.642,30.786 ; 38.642,30.786 cw(c38.642,27.118) 41.236,29.711 41.748,29.199 ccw(c42.777,30.229) 42.777,28.773 47.554,28.773 ccw(c47.554,31.313) 49.35,29.517 v1@50.339,30.506 ; v1(40.602,38.8) 41.065,38.337 ccw(c42.861,40.133) 42.861,37.593 v1(44.24,37.593) ; 42.658,37.693 v1@44.24,37.693
  Bottom Layer w0.7: v1@25.04,34.373 25.04,34.115 ccw(c27.58,34.115) 25.784,32.319 26.226,31.877 ccw(c28.022,33.673) 28.022,31.133 32.035,31.133 ; 32.035,31 32.733,31 cw(c32.733,28.46) 34.529,30.256 34.107,30.679 ccw(c33.01,29.582) 33.01,31.133 32.09,31.133
  other v1: 29.46,31.193
  other v3: 57.28,26.853 61.35,26.853 64.936,26.853
NetC8_1: C8.1 D1.C L1.2 U2.8 | length 25.9
  Top Layer w1: v1(46.86,34.063) 46.79,33.993 46.79,31.433 ccw(c48.74,31.433) L1.2@48.74,29.483
  Bottom Layer w0.3: v1(28.208,32.563) 28.226,32.58 33.999,32.58 cw(c33.999,30.429) 35.52,31.95 36.128,31.342 ccw(c36.34,31.555) 36.173,31.306 v1(36.186,31.297) ; v1@36.183,31.295 37.204,32.316 cw(c37.842,31.678) 37.842,32.58 44.521,32.58 ccw(c44.521,35.3) 46.444,33.377 46.669,33.602 ccw(c46.208,34.063) v1(46.86,34.063)
NetC8_2: C8.2 U2.1 | length 2.4
  Top Layer w0.3: U2.1@30.882,31.205 U2.1@31.295,31.205
  Top Layer w0.4: C8.2@29.452,32.575 U2.1@30.882,31.145
NetC10_2: C10.2 U1.4 | length 1.6
  Top Layer w0.5: U1.4@37.478,32.563 38.842,32.563 ccw(c38.842,32.693) C10.2@38.972,32.693
NetC12_1: C12.1 U2.6 | length 2.4
  Bottom Layer w0.7: v1(36.25,28.646) ccw(c36.25,30.127) 37.297,29.08 v1(38.148,29.931)
NetC21_2: C21.2 ENC.3 R25.2 R29.2 | length 5.1
  Top Layer w0.5: ENC.3@65.994,35.109 65.994,37.193 65.994,38.477 ccw(c65.688,38.477) R25.2@65.904,38.693 65.994,38.693 C21.2@67.358,38.693
NetC22_2: C22.2 ENC.7 R26.2 R30.1 | length 9
  Top Layer w0.2: ENC.7@71.074,35.109 ENC.7@71.272,35.569
  Top Layer w0.5: C22.2@68.602,37.193 68.608,37.187 68.866,37.188 69.866,37.195 70.164,37.195 R26.2@70.166,37.193 ; R30.1@70.16,38.693 cw(c70.051,38.584) 70.205,38.584 v1(70.205,37.217) R26.2@70.166,37.193 ; ENC.7@71.074,35.109 ENC.7@71.074,35.432 ; R26.2@70.166,37.193 R26.2@70.166,37.617 ; R26.2@70.166,37.617 70.167,37.618
  Bottom Layer w0.2: ENC.7@71.074,35.109 71.074,35.637 ENC.7@71.074,35.174
  Bottom Layer w0.5: v1(70.205,37.217) 70.165,37.191 70.165,37.187 70.183,37.177 70.365,37.076 71.249,36.584 cw(c71.003,36.148) 71.472,36.322 cw(c69.748,35.676) 71.589,35.678 71.589,35.645 cw(c71.089,35.645) 71.256,35.174 ENC.7@71.074,35.109 71.089,35.109 ENC.7@71.589,35.11